# EAGLE board Flange_Board_v3 (EAGLE 9.6.2)
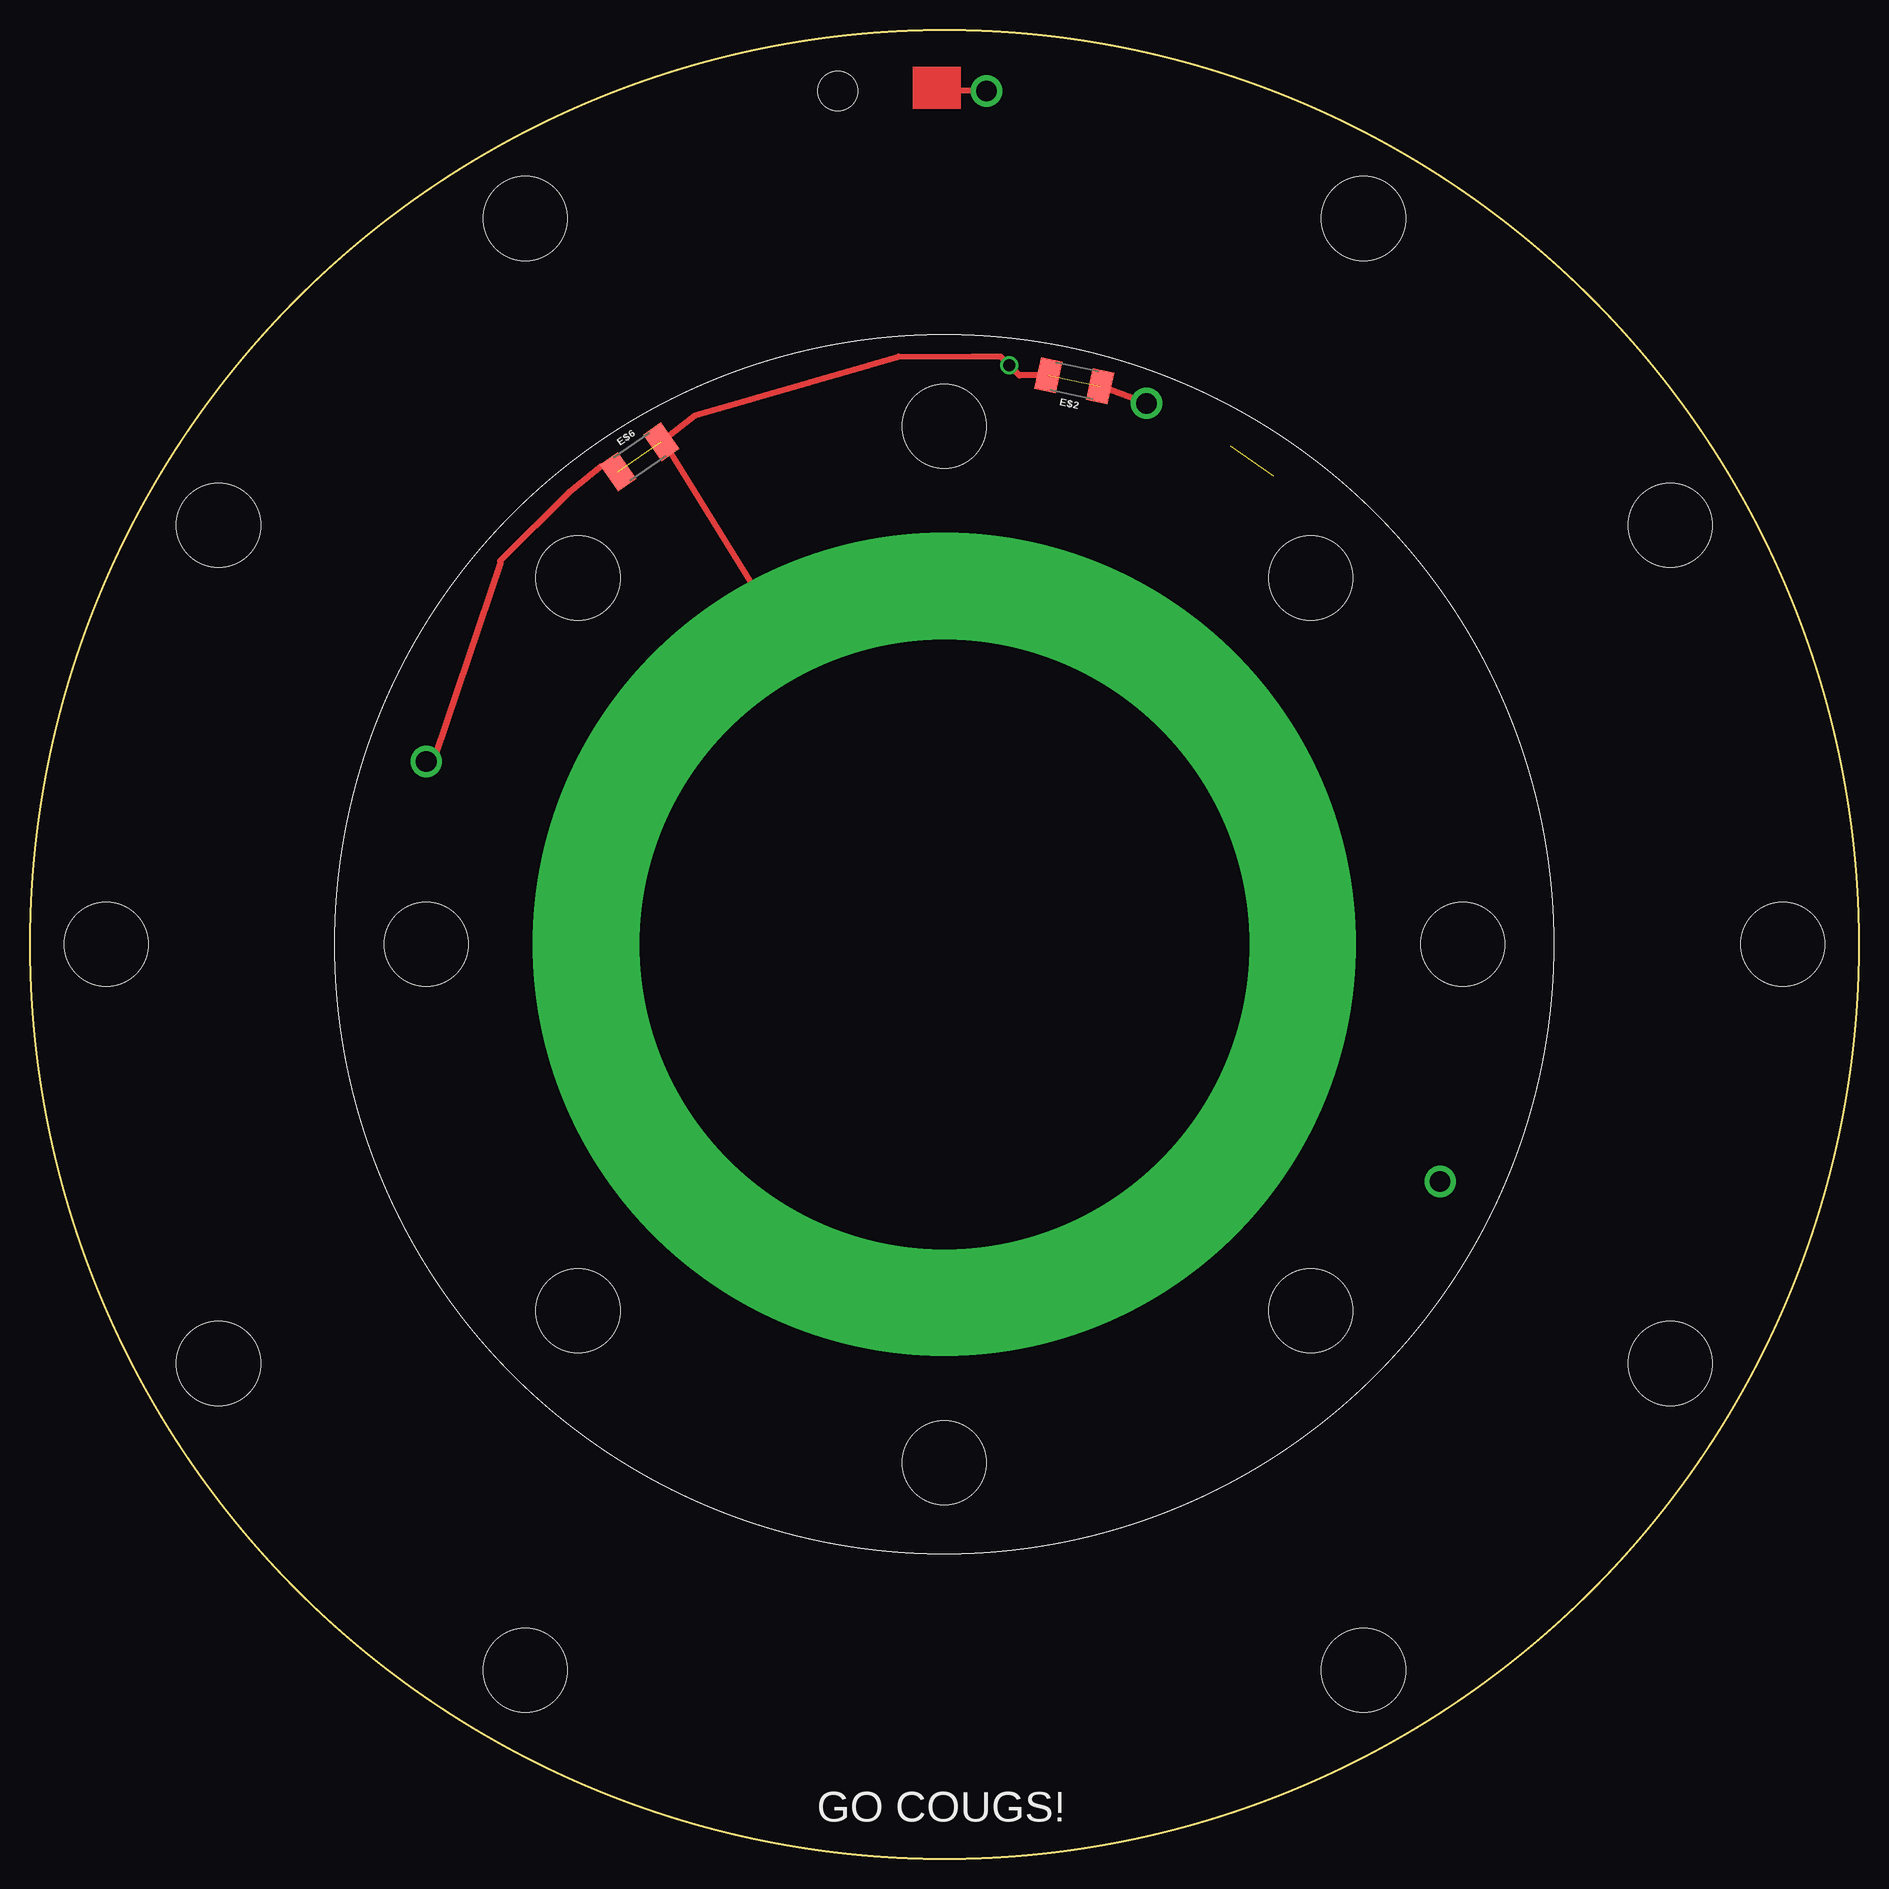
[diagram p0: board, top side]
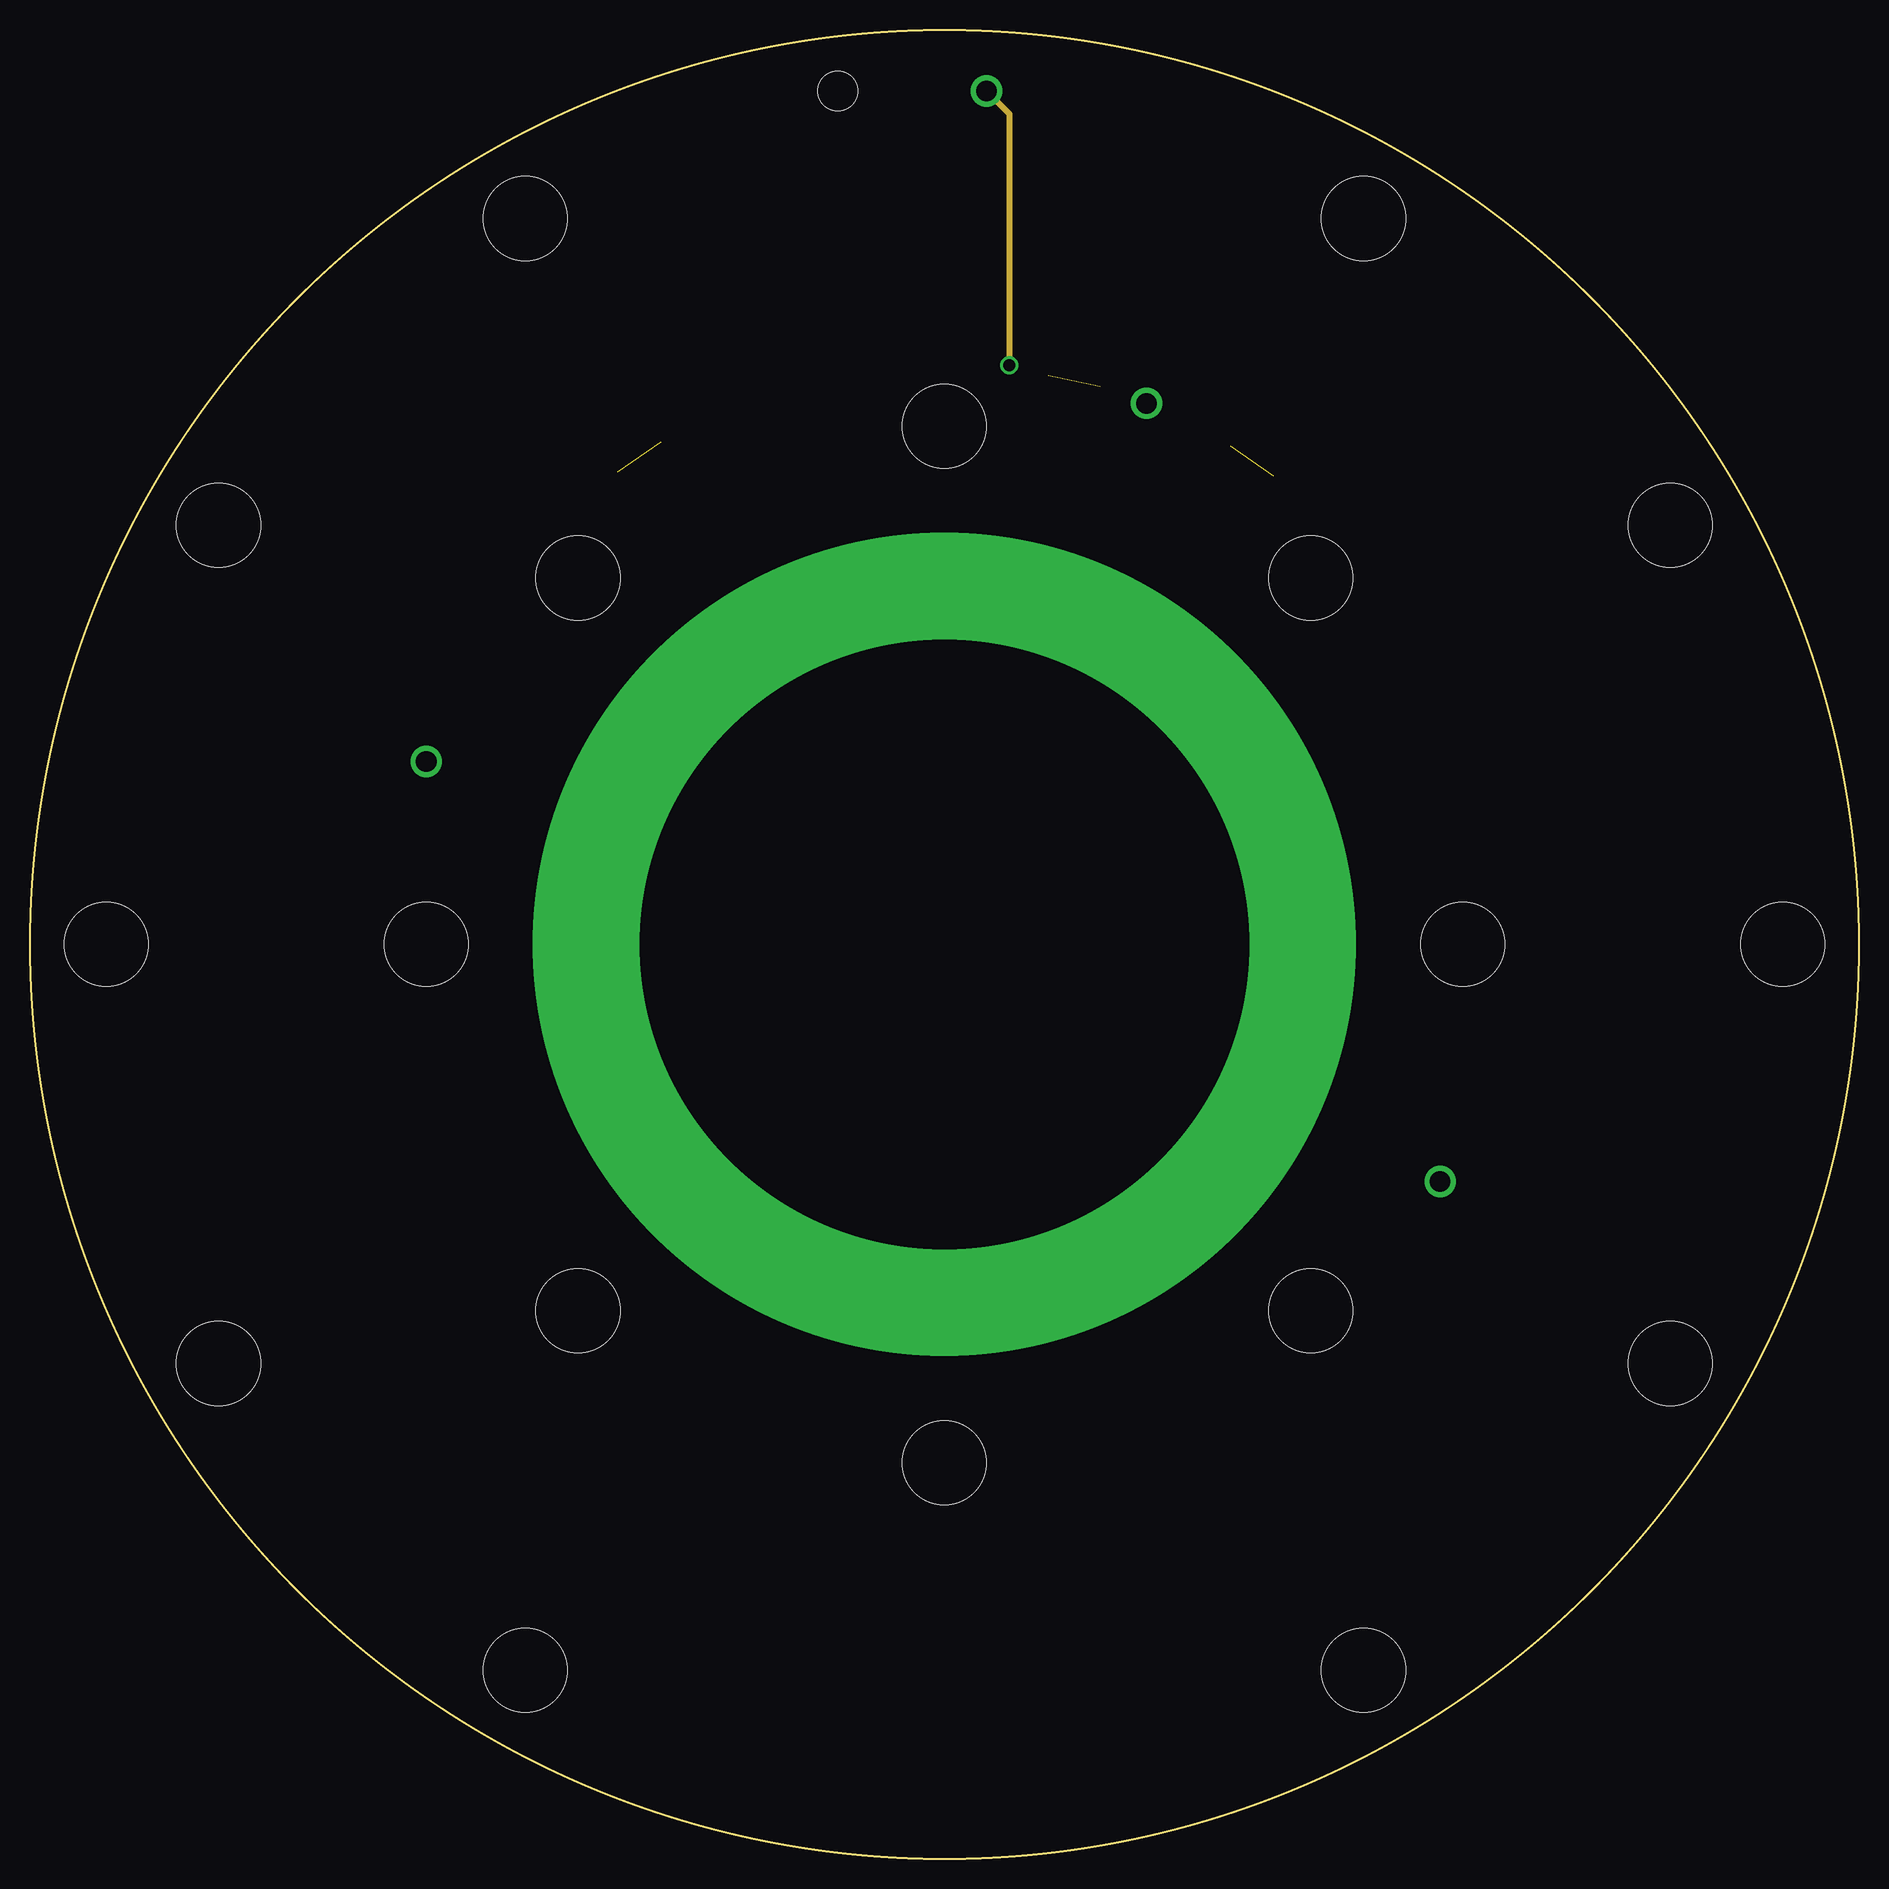
[diagram p1: board, inner layer Route2]
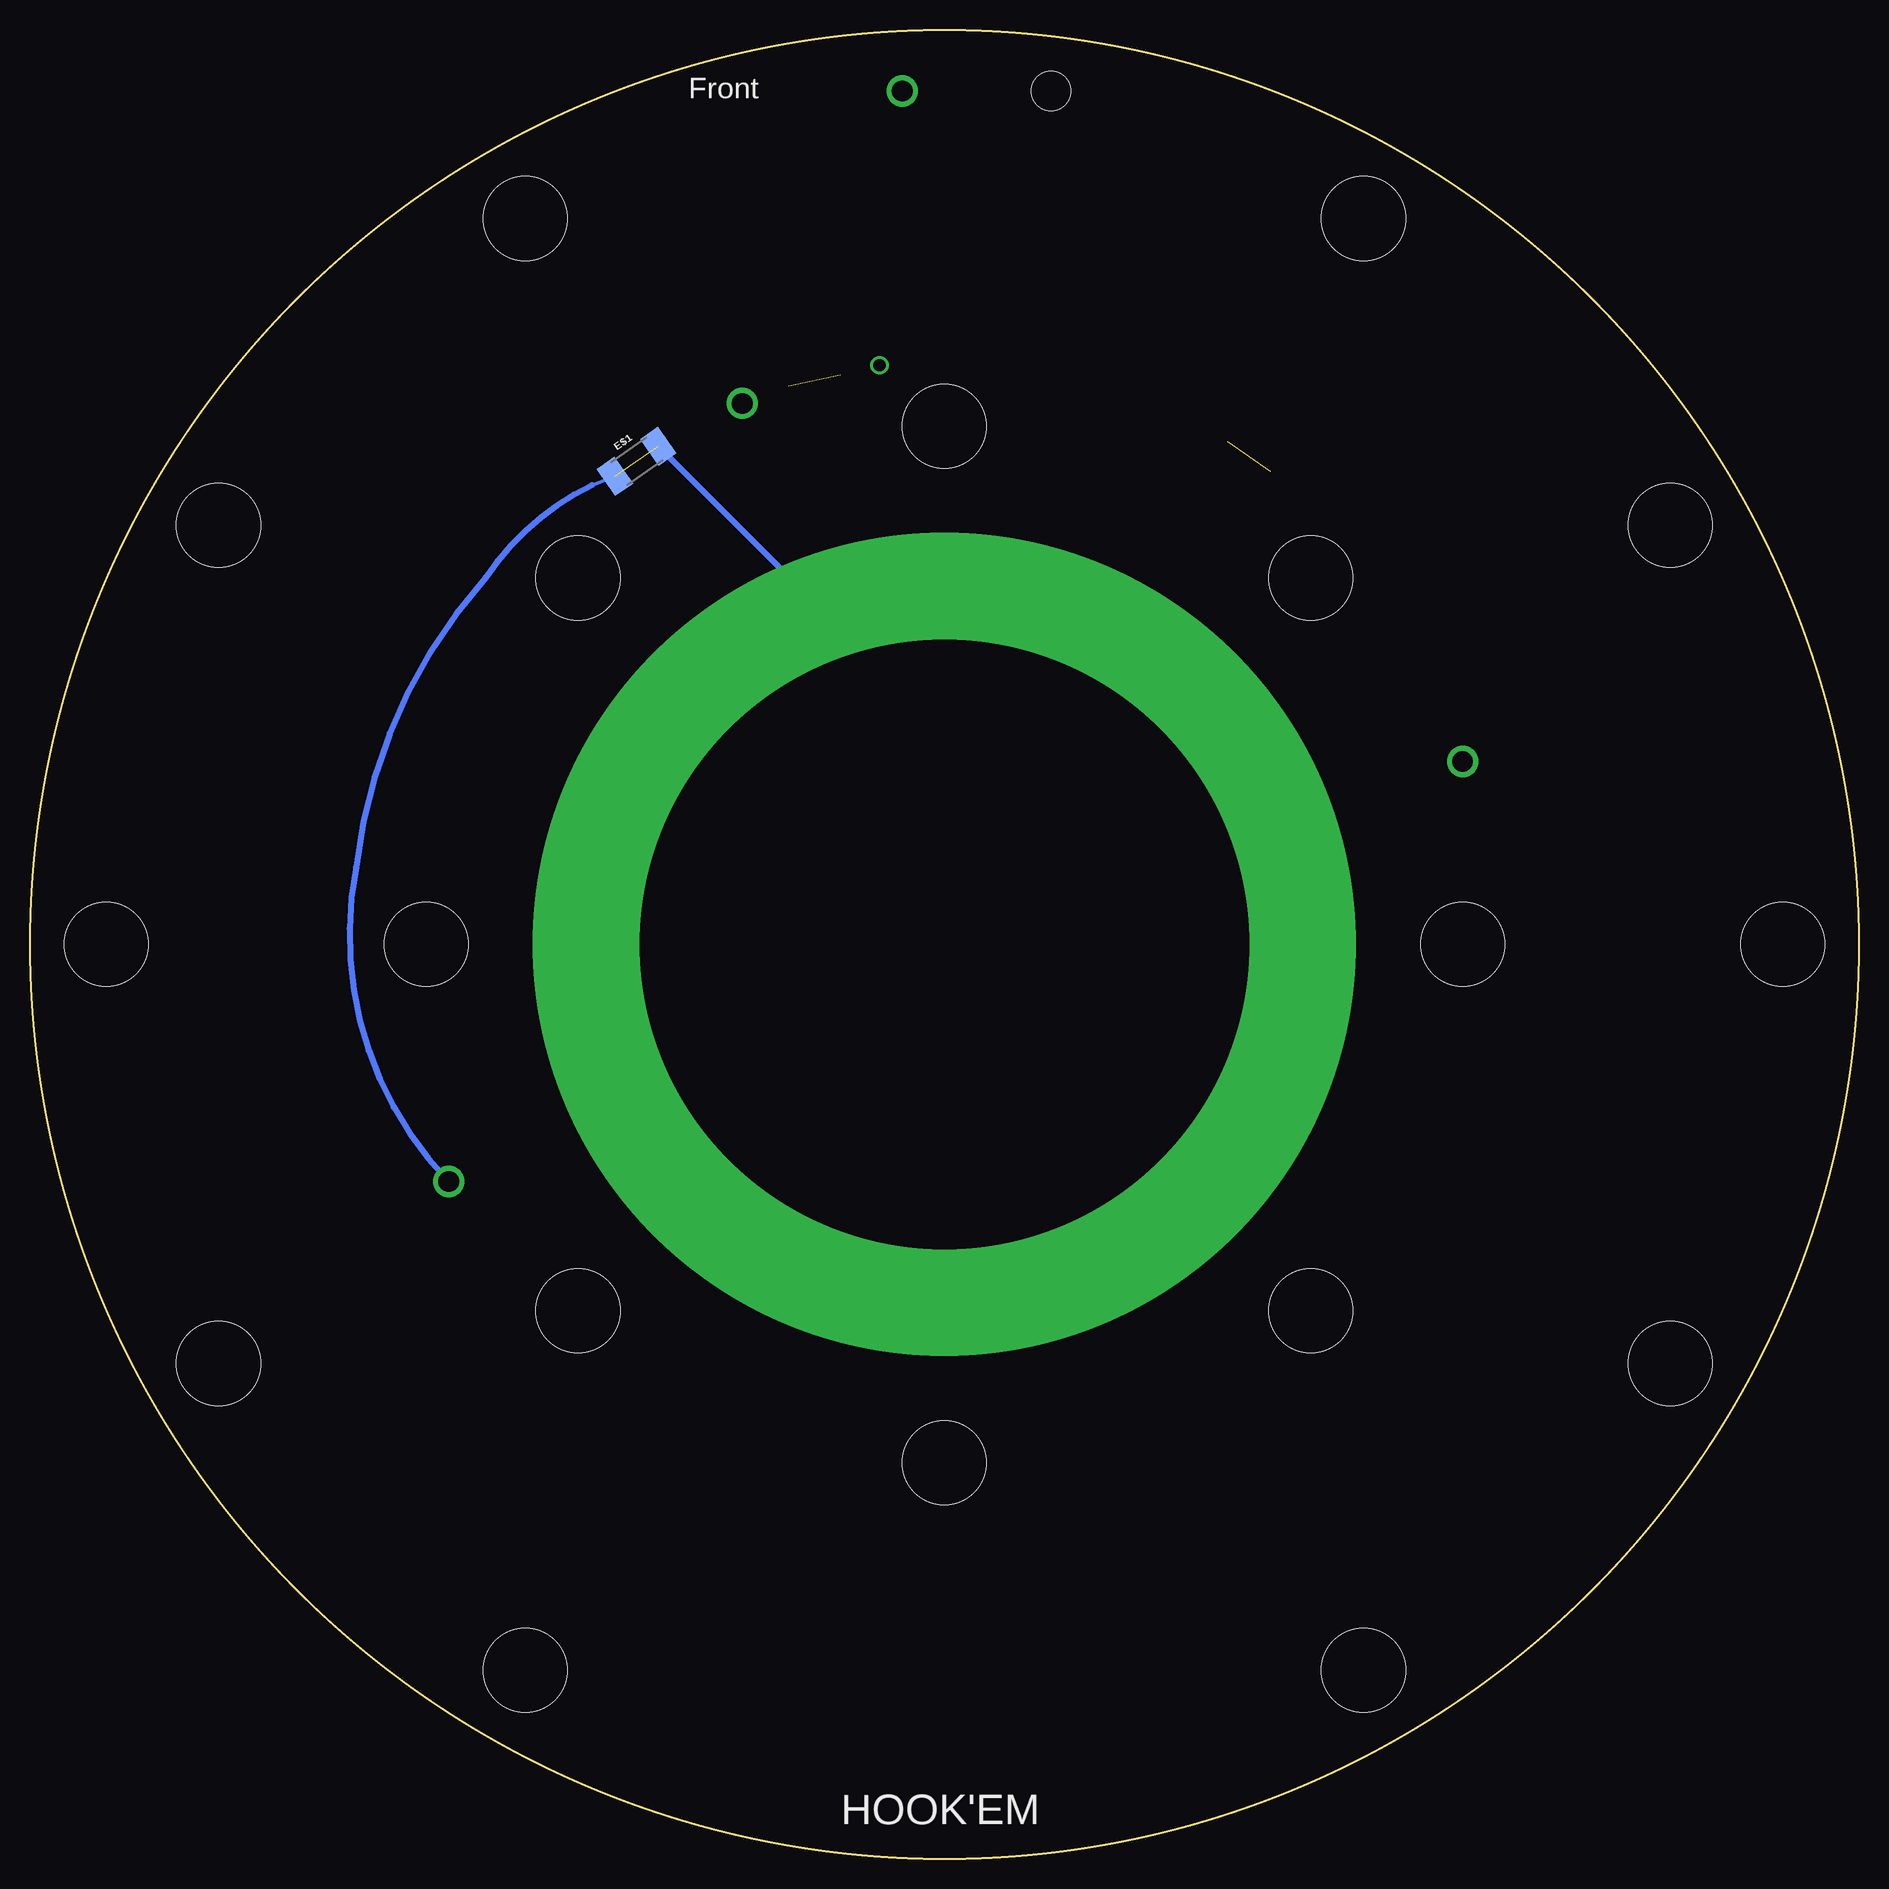
[diagram p2: board, bottom side, seen from below]

Size 152.4 x 152.4 mm. Coordinates in mm from the lower left corner, seen from the top.
Outline: circle at 76.2,76.2 radius 76.2
Copper layers (1+2*15+16): Top 0.035mm / dielectric 1.5mm / Route2 0.035mm / dielectric 0.15mm / Route15 0.035mm / dielectric 0.2mm / Bottom 0.035mm
Design rules "default *": minimum track width 6mil, minimum drill 0.35mm, track to track 6mil, track to pad 6mil, pad to pad 6mil, via to via 6mil, smd to smd 6mil, copper to edge 40mil, drill to drill 6mil, minimum pad ring 10mil, minimum via ring 8mil, stop-mask expansion 4mil, vias tented up to drill 0mil, thermal gap 10mil
Holes 6.99 mm at 45.67,106.73 76.2,119.38 45.67,45.67 106.73,45.67 106.73,106.73 33.02,76.2 76.2,33.02 119.38,76.2 6.35,76.2 146.05,76.2 136.69,111.12 111.12,136.69 15.71,111.12 41.28,136.69 15.71,41.28 41.28,15.71 136.69,41.28 111.12,15.71
Holes 3.3 mm at 67.31,147.32

## Footprints (pad centres in the part's own frame; a part is rotated, then mirrored left to right if it is on the bottom)
2010 = smd 1.8 x 2.7: 1 -2.2,0; 2 2.2,0

## Placement (x,y rotation side)
E$1  [2010]  101.85,116.46 35 bottom
E$2  [2010]  87.02,123.16 168 top
E$6  [2010]  50.8,116.84 35 top

## Library data of the parts
E$1 E$2 E$6 = SparkFun-Resistors

## Nets
S$1: E$1.1 E$1.2 E$2.1 E$2.2 E$6.1 E$6.2

## Tracks (layer width: path | path; a pad name or v marks a point on that pad's centre or on a via)
S$1  (via drill 1.02, 1.73 pad 2.54, 50.8 pad 68.58)  (3 unrouted)
  Top 0.305: 52.83,118.33 E$6.2 53.22,117.48 | 76.2,76.58 v76.2,76.2 | E$6.1 47.65,116.08
  Top 0.508: 52.98,117.83 E$6.2 55.45,120.29 72.37,125.17 78.49,125.2 80.87,125.2 v81.61,124.46 82.45,123.62 E$2.2 | v93.04,121.28 93.01,121.28 E$2.1 | 53.22,117.48 70.23,90.02 76.2,76.58 | 47.65,116.08 44.92,113.89 39.18,108.15 39.22,108.1 33.79,91.95 33.27,91.44 v33.02,91.44 | v79.7,147.32 76.2,147.32
  Route2 0.508: v79.7,147.32 81.61,145.42 v81.61,124.46
  Bottom 0.305: E$1.1 105.55,114.48
  Bottom 0.508: E$1.2 76.07,93.74 76.07,76.33 v76.2,76.2 | 105.55,114.48 arc-30 114.43,106.76 arc-35 125.22,82.65 arc-55 v117.51,56.44
(copper drawn outside any net)
  shapes: Top area x1

## Text on the board
bPlace: Front | HOOK'EM
tNames: GO COUGS!
tValues: Back | 0 Ohm or Std. Res